# EAGLE board AniBike_v2.72_HS_MainBoard (EAGLE 5.08), part 1 of 2
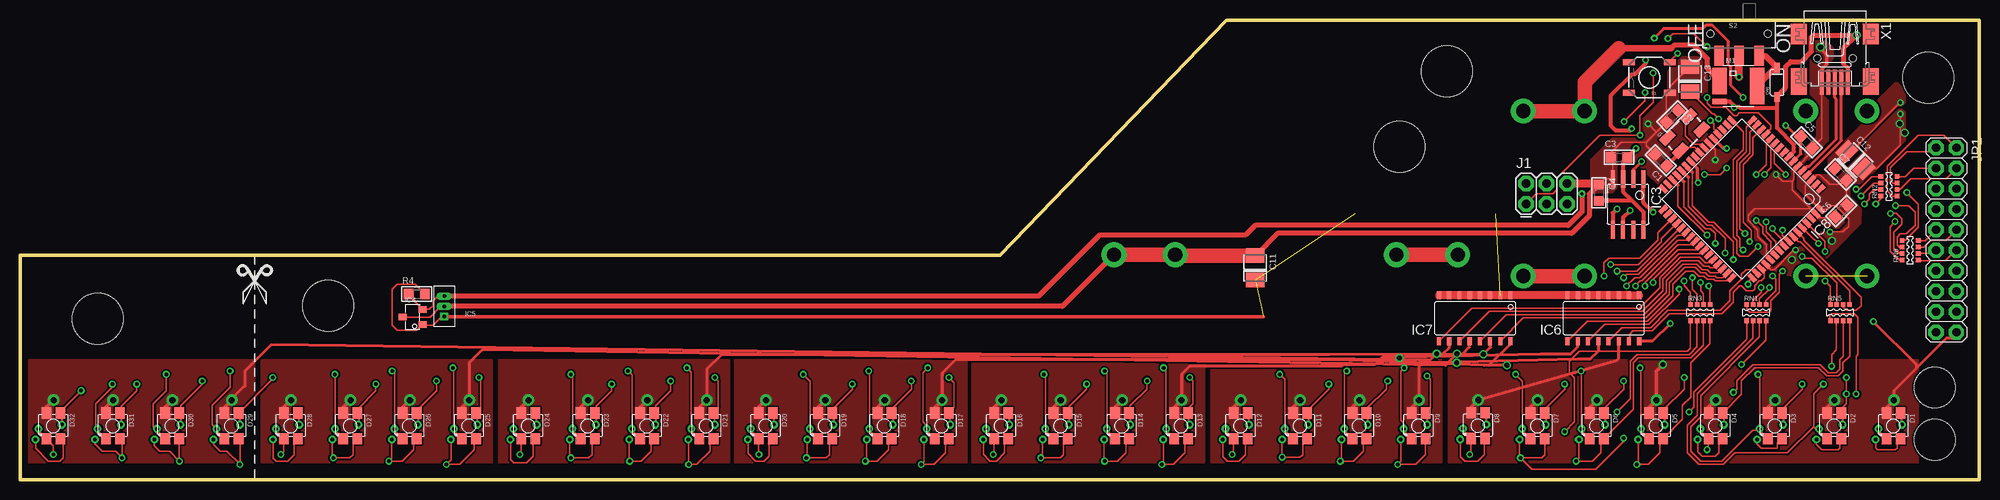
[diagram p0: board, top side]
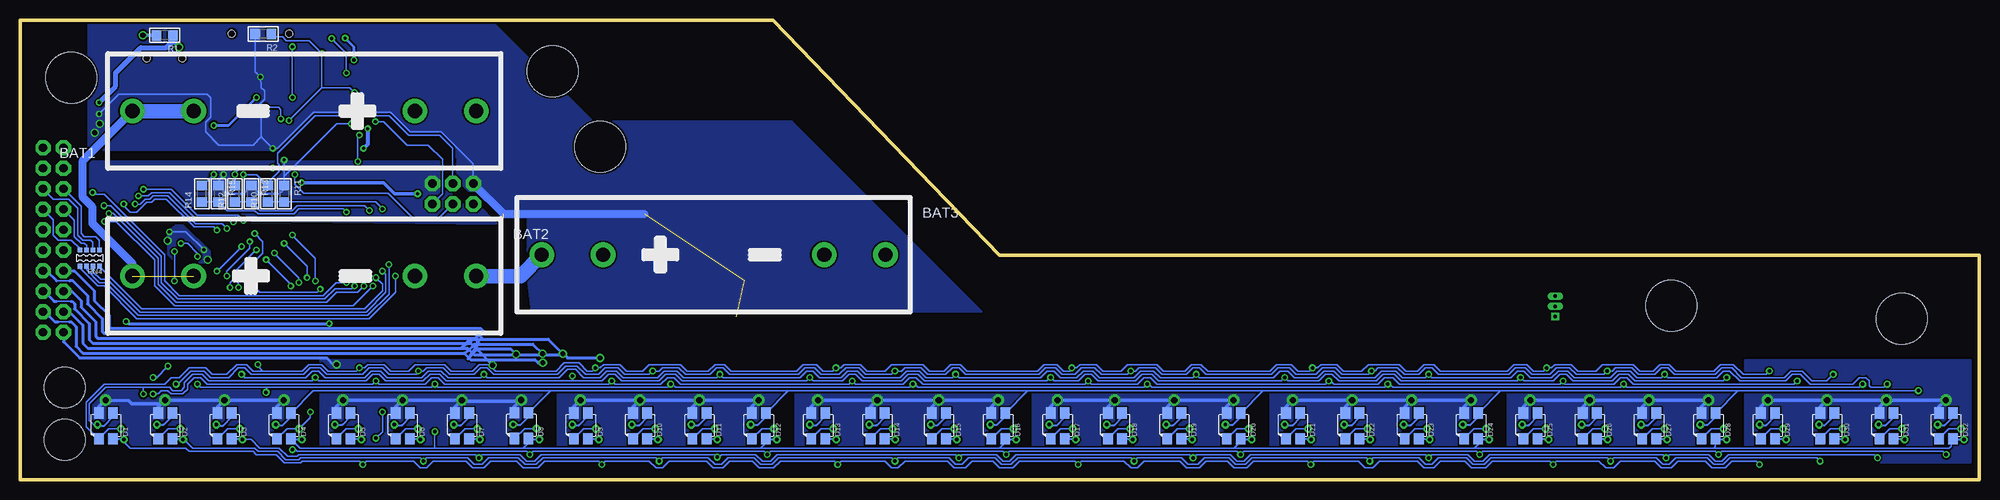
[diagram p1: board, bottom side, seen from below]

Size 243.13 x 57 mm. Coordinates in mm from the lower left corner, seen from the top.
Outline: 243.13,0 0,0 0,27.84 121.56,27.84 149.71,57 243.13,57 243.13,0
Copper layers (1*16): Top 0.035mm / dielectric 1.5mm / Bottom 0.035mm
Design rules "default *": minimum track width 7mil, minimum drill 15mil, track to track 8mil, track to pad 8mil, pad to pad 8mil, via to via 8mil, smd to smd 8mil, copper to edge 10mil, drill to drill 15mil, minimum pad ring 10mil, minimum via ring 8mil, stop-mask expansion 4mil, vias tented up to drill 0mil, thermal gap 10mil
Holes 6.35 mm at 236.78,49.83 9.6,19.96 38.25,21.59 171.15,41.3 177.04,50.65
Holes 5.08 mm at 237.59,4.93 237.59,11.43

## Footprints (pad centres in the part's own frame; a part is rotated, then mirrored left to right if it is on the bottom)
BATTERY_AAA = drill 1.778 pad 3.048 round: MINUS1 21.336,0; MINUS2 13.716,0; PLUS1 -21.336,0; PLUS2 -13.716,0
C0805 = smd 1.2 x 1.3: 1 -1.016,0; 2 1.016,0
C3528-21/T = smd 1.778 x 2.286: + 1.524,0; - -1.524,0
LED1210_DS = drill 0.432 pad 0.889 round: 1 -1.913,-0.353; 2 -2.25,-1.68; 3 1,0.15 | smd 1.2 x 1.4 bottom: 1_BOTTOM 0.85,-1.6; 2_BOTTOM -0.9,-1.6; 3_BOTTOM -0.9,1.6; 4_BOTTOM 0.85,1.6 | smd 1.2 x 1.4: 1_TOP -0.9,-1.6; 2_TOP 0.85,-1.6; 3_TOP 0.85,1.6; 4_TOP -0.9,1.6 | drill 0.762 pad 1.422 round: 4 0,3.2
SOD-123 = smd 1.2 x 0.7: ANODE -1.82,0; CATHODE 1.82,0
SOIC8 = smd 0.5 x 2.2: 1 -1.905,-3.154; 2 -0.645,-3.154; 3 0.625,-3.154; 4 1.895,-3.154; 5 1.905,3.154; 6 0.635,3.154; 7 -0.635,3.154; 8 -1.905,3.154
HALL_SENSOR_SE = smd 1 x 0.8: 1 1.15,-1; 2 1.15,0.9; 3 -1.35,-0.05
HALL_SENSOR_UA = drill 0.45 square: 1 0,-1.27 | drill 0.45 long: 2 0,0; 3 0,1.27
SOIC16 = smd 0.5 x 1: 1 -4.41,-2.84; 2 -3.14,-2.84; 3 -1.87,-2.84; 4 -0.6,-2.84; 5 0.67,-2.84; 6 1.94,-2.84; 7 3.21,-2.84; 8 4.48,-2.84; 9 4.48,2.84; 10 3.21,2.84; 11 1.94,2.84; 12 0.67,2.84; 13 -0.6,2.84; 14 -1.87,2.84; 15 -3.14,2.84; 16 -4.41,2.84
TQFP64 = smd 1.194 x 0.559: 1 -7.8,6; 2 -7.8,5.2; 3 -7.8,4.4; 4 -7.8,3.6; 5 -7.8,2.8; 6 -7.8,2; 7 -7.8,1.2; 8 -7.8,0.4; 9 -7.8,-0.4; 10 -7.8,-1.2; 11 -7.8,-2; 12 -7.8,-2.8; 13 -7.8,-3.6; 14 -7.8,-4.4; 15 -7.8,-5.2; 16 -7.8,-6; 33 7.8,-6; 34 7.8,-5.2; 35 7.8,-4.4; 36 7.8,-3.6; 37 7.8,-2.8; 38 7.8,-2; 39 7.8,-1.2; 40 7.8,-0.4; 41 7.8,0.4; 42 7.8,1.2; 43 7.8,2; 44 7.8,2.8; 45 7.8,3.6; 46 7.8,4.4; 47 7.8,5.2; 48 7.8,6 | smd 0.559 x 1.194: 17 -6,-7.8; 18 -5.2,-7.8; 19 -4.4,-7.8; 20 -3.6,-7.8; 21 -2.8,-7.8; 22 -2,-7.8; 23 -1.2,-7.8; 24 -0.4,-7.8; 25 0.4,-7.8; 26 1.2,-7.8; 27 2,-7.8; 28 2.8,-7.8; 29 3.6,-7.8; 30 4.4,-7.8; 31 5.2,-7.8; 32 6,-7.8; 49 6,7.8; 50 5.2,7.8; 51 4.4,7.8; 52 3.6,7.8; 53 2.8,7.8; 54 2,7.8; 55 1.2,7.8; 56 0.4,7.8; 57 -0.4,7.8; 58 -1.2,7.8; 59 -2,7.8; 60 -2.8,7.8; 61 -3.6,7.8; 62 -4.4,7.8; 63 -5.2,7.8; 64 -6,7.8
2X3 = drill 1.016 pad 1.88 octagon: 1 0,0; 2 0,2.54; 3 2.54,0; 4 2.54,2.54; 5 5.08,0; 6 5.08,2.54
2X10 = drill 1.016 pad 1.88 octagon: 1 -11.43,-1.27; 2 -11.43,1.27; 3 -8.89,-1.27; 4 -8.89,1.27; 5 -6.35,-1.27; 6 -6.35,1.27; 7 -3.81,-1.27; 8 -3.81,1.27; 9 -1.27,-1.27; 10 -1.27,1.27; 11 1.27,-1.27; 12 1.27,1.27; 13 3.81,-1.27; 14 3.81,1.27; 15 6.35,-1.27; 16 6.35,1.27; 17 8.89,-1.27; 18 8.89,1.27; 19 11.43,-1.27; 20 11.43,1.27
PMOS_SO-8 = smd 3.3 x 1.78: 1 -0.635,-2.326 | smd 0.72 x 1.78: 2 1.905,-2.326 | smd 4.53 x 1.78: 3 0,2.326
CRYSTAL-SMD-5X3 = smd 1.9 x 1.1: 1 -1.85,-1.15; 2 1.85,-1.15; 3 1.85,1.15; 4 -1.85,1.15
R0805 = smd 1.2 x 1.3: 1 -1.016,0; 2 1.016,0
YCTC164 = smd 0.559 x 0.6: P$1 -1.2,-1.003; P$2 -0.4,-1.003; P$3 0.4,-1.003; P$4 1.2,-1.003; P$5 1.2,1.003; P$6 0.4,1.003; P$7 -0.4,1.003; P$8 -1.2,1.003
TACTILE_SWITCH_SMD = smd 1.524 x 0.762: 1 -2.54,1.905; 2 2.54,1.905; 3 -2.54,-1.905; 4 2.54,-1.905
SWITCH-SPDT-SMD = smd 1.2 x 2.5: 1 -2.5,-2.75; 2 0,-2.75; 3 2.5,-2.75 | hole 0.9: -3.55,0; 3.55,0
32005-201 = smd 3.1 x 0.5: 1 3,1.6; 2 3,0.8; 3 3,0; 4 3,-0.8; 5 3,-1.6 | smd 2.5 x 2: M1 -3,-4.45; M2 -3,4.45 | smd 3.3 x 2: M3 2.9,4.45; M4 2.9,-4.45 | hole 0.9: 0,2.2; 0,-2.2

## Placement (x,y rotation side)
BAT1  BATTERY_AAA  [BATTERY_AAA]  207.87,45.72 180 bottom
BAT2  BATTERY_AAA  [BATTERY_AAA]  207.87,25.25 0 bottom
BAT3  BATTERY_AAA  [BATTERY_AAA]  157.07,27.89 0 bottom
C1  22pF  [C0805]  203.61,39.62 135 top
C2  22pF  [C0805]  205.03,45.06 225 top
C3  100nF  [C0805]  198.42,39.98 0 top
C4  100nF  [C0805]  195.91,35.59 270 top
C5  1uF  [C0805]  221.69,41.86 315 top
C6  100nF  [C0805]  226.01,33.32 45 top
C7  100nF  [C0805]  225.91,37.85 315 top
C11  47uF  [C3528-21/T]  153.26,26.26 270 top
C12  10uF  [C3528-21/T]  227.74,39.62 315 top
C13  10uF  [C3528-21/T]  207.21,49.68 270 top
D1  LED_RGB_DS  [LED1210_DS]  232.51,6.65 0 top
D2  LED_RGB_DS  [LED1210_DS]  225.15,6.65 0 top
D3  LED_RGB_DS  [LED1210_DS]  217.78,6.65 0 top
D4  LED_RGB_DS  [LED1210_DS]  210.41,6.65 0 top
D5  LED_RGB_DS  [LED1210_DS]  203.05,6.65 0 top
D6  LED_RGB_DS  [LED1210_DS]  195.68,6.65 0 top
D7  LED_RGB_DS  [LED1210_DS]  188.32,6.65 0 top
D8  LED_RGB_DS  [LED1210_DS]  180.95,6.68 0 top
D9  LED_RGB_DS  [LED1210_DS]  173.58,6.65 0 top
D10  LED_RGB_DS  [LED1210_DS]  166.22,6.65 0 top
D11  LED_RGB_DS  [LED1210_DS]  158.85,6.65 0 top
D12  LED_RGB_DS  [LED1210_DS]  151.49,6.65 0 top
D13  LED_RGB_DS  [LED1210_DS]  144.12,6.65 0 top
D14  LED_RGB_DS  [LED1210_DS]  136.75,6.65 0 top
D15  LED_RGB_DS  [LED1210_DS]  129.13,6.65 0 top
D16  LED_RGB_DS  [LED1210_DS]  121.77,6.65 0 top
D17  LED_RGB_DS  [LED1210_DS]  114.4,6.65 0 top
D18  LED_RGB_DS  [LED1210_DS]  107.29,6.65 0 top
D19  LED_RGB_DS  [LED1210_DS]  99.92,6.65 0 top
D20  LED_RGB_DS  [LED1210_DS]  92.56,6.65 0 top
D21  LED_RGB_DS  [LED1210_DS]  85.19,6.65 0 top
D22  LED_RGB_DS  [LED1210_DS]  77.83,6.65 0 top
D23  LED_RGB_DS  [LED1210_DS]  70.46,6.65 0 top
D24  LED_RGB_DS  [LED1210_DS]  63.09,6.65 0 top
D25  LED_RGB_DS  [LED1210_DS]  55.73,6.65 0 top
D26  LED_RGB_DS  [LED1210_DS]  48.36,6.65 0 top
D27  LED_RGB_DS  [LED1210_DS]  41,6.65 0 top
D28  LED_RGB_DS  [LED1210_DS]  33.63,6.65 0 top
D29  LED_RGB_DS  [LED1210_DS]  26.26,6.65 0 top
D30  LED_RGB_DS  [LED1210_DS]  18.9,6.65 0 top
D31  LED_RGB_DS  [LED1210_DS]  11.53,6.65 0 top
D32  LED_RGB_DS  [LED1210_DS]  4.17,6.65 0 top
D40  SM5819A  [SOD-123]  218.03,49.28 90 top
IC3  AT26DF321  [SOIC8]  199.54,34.14 180 top
IC4  HALL_SENSORSMT  [HALL_SENSOR_SE]  48.82,20.22 0 top
IC5  HALL_SENSORTH  [HALL_SENSOR_UA]  52.63,21.49 0 top
IC6  MMPQ2222  [SOIC16]  196.49,20.02 180 top
IC7  MMPQ2222  [SOIC16]  180.54,20.02 180 top
IC8  AT90USB647-AU  [TQFP64]  213.66,34.8 225 top
J1  AVR_SPI_PRG_6PTH  [2X3]  186.89,34.19 0 top
JP1  [2X10]  239.01,29.72 270 top
M1  IRF7404  [PMOS_SO-8]  213.21,48.82 270 top
Q1  [CRYSTAL-SMD-5X3]  206.55,42.93 45 top
R1  33k  [R0805]  225.2,55.12 180 bottom
R2  10K  [R0805]  212.95,55.27 180 bottom
R4  10K  [R0805]  49.23,23.01 0 top
R10  301  [R0805]  212.39,35.46 90 bottom
R11  650  [R0805]  210.36,35.46 270 bottom
R12  301  [R0805]  216.46,35.46 90 bottom
R13  650  [R0805]  214.43,35.46 270 bottom
R14  15k  [R0805]  220.57,35.46 90 bottom
R15  33k  [R0805]  218.52,35.46 270 bottom
RN1  RESISTOR_ARR4  [YCTC164]  215.44,20.73 0 top
RN2  RESISTOR_ARR4  [YCTC164]  231.9,36.37 90 top
RN3  RESISTOR_ARR4  [YCTC164]  208.48,20.73 0 top
RN4  RESISTOR_ARR4  [YCTC164]  234.49,27.48 180 bottom
RN5  RESISTOR_ARR4  [YCTC164]  225.83,20.73 0 top
RN6  RESISTOR_ARR4  [YCTC164]  234.54,28.45 90 top
S1  SWITCH-MOMENTARY-2SMD  [TACTILE_SWITCH_SMD]  202.18,49.89 180 top
S2  [SWITCH-SPDT-SMD]  213.31,55.32 0 top
X1  MINI-USB-32005-201  [32005-201]  225.2,52.27 270 top

## Library data of the parts
BAT1-BAT3 C1-C7 C11-C13 IC3 R1 R2 R4 X1 = AniBike_v3.0_Library
D1-D32 D40 IC4-IC7 M1 R10-R15 RN1-RN6 = AniBike_Common_Library
IC8 = at90usb
J1 JP1 Q1 S1 S2 = SparkFun

## Nets
+3V3: C3.2 C4.2 C5.1 IC3.3 IC3.8 IC8.7
+5V: C6.2 C7.2 C11.+ C12.+ IC4.1 IC5.1 IC6.1 IC6.2 IC6.3 IC6.4 IC6.5 IC6.6 IC6.7 IC6.8 IC7.1 IC7.2 IC7.3 IC7.4 IC7.5 IC7.6 IC7.7 IC7.8 IC8.3 IC8.21 IC8.52 IC8.64 J1.2 R2.2 R4.2 S2.2
CS: IC8.10 R14.2
CS_FLASH: IC3.1 R14.1 R15.2
D+: IC8.5 X1.3
D-: IC8.4 X1.2
GND: BAT3.MINUS1 BAT3.MINUS2 C1.2 C2.2 C3.1 C4.1 C5.2 C6.1 C7.1 C11.- C12.- C13.- IC3.4 IC4.3 IC5.2 IC8.6 IC8.22 IC8.53 IC8.63 J1.6 R1.1 R11.1 R13.1 R15.1 S1.1 X1.5
INT_SENSOR: IC4.2 IC5.3 IC8.26 R4.1
L1_B1: IC8.61 RN5.P$8
L1_B1_LED: D1.3 D1.3_BOTTOM D1.3_TOP D5.3 D5.3_BOTTOM D5.3_TOP D9.3 D9.3_BOTTOM D9.3_TOP D13.3 D13.3_BOTTOM D13.3_TOP D17.3 D17.3_BOTTOM D17.3_TOP D21.3 D21.3_BOTTOM D21.3_TOP D25.3 D25.3_BOTTOM D25.3_TOP D29.3 D29.3_BOTTOM D29.3_TOP RN5.P$1
L1_B2: IC8.60 RN5.P$7
L1_B2_LED: D2.3 D2.3_BOTTOM D2.3_TOP D6.3 D6.3_BOTTOM D6.3_TOP D10.3 D10.3_BOTTOM D10.3_TOP D14.3 D14.3_BOTTOM D14.3_TOP D18.3 D18.3_BOTTOM D18.3_TOP D22.3 D22.3_BOTTOM D22.3_TOP D26.3 D26.3_BOTTOM D26.3_TOP D30.3 D30.3_BOTTOM D30.3_TOP RN5.P$2
L1_B3: IC8.59 RN5.P$6
L1_B3_LED: D3.3 D3.3_BOTTOM D3.3_TOP D7.3 D7.3_BOTTOM D7.3_TOP D11.3 D11.3_BOTTOM D11.3_TOP D15.3 D15.3_BOTTOM D15.3_TOP D19.3 D19.3_BOTTOM D19.3_TOP D23.3 D23.3_BOTTOM D23.3_TOP D27.3 D27.3_BOTTOM D27.3_TOP D31.3 D31.3_BOTTOM D31.3_TOP RN5.P$3
L1_B4: IC8.58 RN5.P$5
L1_B4_LED: D4.3 D4.3_BOTTOM D4.3_TOP D8.3 D8.3_BOTTOM D8.3_TOP D12.3 D12.3_BOTTOM D12.3_TOP D16.3 D16.3_BOTTOM D16.3_TOP D20.3 D20.3_BOTTOM D20.3_TOP D24.3 D24.3_BOTTOM D24.3_TOP D28.3 D28.3_BOTTOM D28.3_TOP D32.3 D32.3_BOTTOM D32.3_TOP RN5.P$4
L1_G1: IC8.27 RN3.P$5
L1_G1_LED: D1.2 D1.2_BOTTOM D1.2_TOP D5.2 D5.2_BOTTOM D5.2_TOP D9.2 D9.2_BOTTOM D9.2_TOP D13.2 D13.2_BOTTOM D13.2_TOP D17.2 D17.2_BOTTOM D17.2_TOP D21.2 D21.2_BOTTOM D21.2_TOP D25.2 D25.2_BOTTOM D25.2_TOP D29.2 D29.2_BOTTOM D29.2_TOP RN3.P$4
L1_G2: IC8.28 RN3.P$6
L1_G2_LED: D2.2 D2.2_BOTTOM D2.2_TOP D6.2 D6.2_BOTTOM D6.2_TOP D10.2 D10.2_BOTTOM D10.2_TOP D14.2 D14.2_BOTTOM D14.2_TOP D18.2 D18.2_BOTTOM D18.2_TOP D22.2 D22.2_BOTTOM D22.2_TOP D26.2 D26.2_BOTTOM D26.2_TOP D30.2 D30.2_BOTTOM D30.2_TOP RN3.P$3
L1_G3: IC8.29 RN3.P$7
L1_G3_LED: D3.2 D3.2_BOTTOM D3.2_TOP D7.2 D7.2_BOTTOM D7.2_TOP D11.2 D11.2_BOTTOM D11.2_TOP D15.2 D15.2_BOTTOM D15.2_TOP D19.2 D19.2_BOTTOM D19.2_TOP D23.2 D23.2_BOTTOM D23.2_TOP D27.2 D27.2_BOTTOM D27.2_TOP D31.2 D31.2_BOTTOM D31.2_TOP RN3.P$2
L1_G4: IC8.30 RN3.P$8
L1_G4_LED: D4.2 D4.2_BOTTOM D4.2_TOP D8.2 D8.2_BOTTOM D8.2_TOP D12.2 D12.2_BOTTOM D12.2_TOP D16.2 D16.2_BOTTOM D16.2_TOP D20.2 D20.2_BOTTOM D20.2_TOP D24.2 D24.2_BOTTOM D24.2_TOP D28.2 D28.2_BOTTOM D28.2_TOP D32.2 D32.2_BOTTOM D32.2_TOP RN3.P$1
L1_R1: IC8.14 RN1.P$5
L1_R1_LED: D1.1 D1.1_BOTTOM D1.1_TOP D5.1 D5.1_BOTTOM D5.1_TOP D9.1 D9.1_BOTTOM D9.1_TOP D13.1 D13.1_BOTTOM D13.1_TOP D17.1 D17.1_BOTTOM D17.1_TOP D21.1 D21.1_BOTTOM D21.1_TOP D25.1 D25.1_BOTTOM D25.1_TOP D29.1 D29.1_BOTTOM D29.1_TOP RN1.P$4
L1_R2: IC8.15 RN1.P$7
L1_R2_LED: D2.1 D2.1_BOTTOM D2.1_TOP D6.1 D6.1_BOTTOM D6.1_TOP D10.1 D10.1_BOTTOM D10.1_TOP D14.1 D14.1_BOTTOM D14.1_TOP D18.1 D18.1_BOTTOM D18.1_TOP D22.1 D22.1_BOTTOM D22.1_TOP D26.1 D26.1_BOTTOM D26.1_TOP D30.1 D30.1_BOTTOM D30.1_TOP RN1.P$2
L1_R3: IC8.16 RN1.P$6
L1_R3_LED: D3.1 D3.1_BOTTOM D3.1_TOP D7.1 D7.1_BOTTOM D7.1_TOP D11.1 D11.1_BOTTOM D11.1_TOP D15.1 D15.1_BOTTOM D15.1_TOP D19.1 D19.1_BOTTOM D19.1_TOP D23.1 D23.1_BOTTOM D23.1_TOP D27.1 D27.1_BOTTOM D27.1_TOP D31.1 D31.1_BOTTOM D31.1_TOP RN1.P$3
L1_R4: IC8.17 RN1.P$8
L1_R4_LED: D4.1 D4.1_BOTTOM D4.1_TOP D8.1 D8.1_BOTTOM D8.1_TOP D12.1 D12.1_BOTTOM D12.1_TOP D16.1 D16.1_BOTTOM D16.1_TOP D20.1 D20.1_BOTTOM D20.1_TOP D24.1 D24.1_BOTTOM D24.1_TOP D28.1 D28.1_BOTTOM D28.1_TOP D32.1 D32.1_BOTTOM D32.1_TOP RN1.P$1
L2_B1: IC8.39 RN6.P$8
L2_B1_LED: JP1.12 RN6.P$1
L2_B2: IC8.40 RN6.P$7
L2_B2_LED: JP1.11 RN6.P$2
L2_B3: IC8.41 RN6.P$6
L2_B3_LED: JP1.10 RN6.P$3
L2_B4: IC8.42 RN6.P$5
L2_B4_LED: JP1.9 RN6.P$4
L2_G1: IC8.35 RN4.P$5
L2_G1_LED: JP1.8 RN4.P$4
L2_G2: IC8.36 RN4.P$6
L2_G2_LED: JP1.7 RN4.P$3
L2_G3: IC8.37 RN4.P$7
L2_G3_LED: JP1.6 RN4.P$2
L2_G4: IC8.38 RN4.P$8
L2_G4_LED: JP1.5 RN4.P$1
L2_R1: IC8.57 RN2.P$8
L2_R1_LED: JP1.2 RN2.P$1
L2_R2: IC8.56 RN2.P$7
L2_R2_LED: JP1.4 RN2.P$2
L2_R3: IC8.55 RN2.P$6
L2_R3_LED: JP1.1 RN2.P$3
L2_R4: IC8.54 RN2.P$5
L2_R4_LED: JP1.3 RN2.P$4
MISO: IC3.2 IC8.13 J1.1
MOSI: IC8.12 J1.4 R10.2
MOSI_FLASH: IC3.5 R10.1 R11.2
N$1: C2.1 IC8.23 Q1.3
N$2: C1.1 IC8.24 Q1.1
N$3: D40.CATHODE M1.3 S2.3
N$4: BAT2.MINUS1 BAT2.MINUS2 BAT3.PLUS1 BAT3.PLUS2
N$5: BAT1.MINUS1 BAT1.MINUS2 BAT2.PLUS1 BAT2.PLUS2
RESET: IC8.20 J1.5 R2.1 S1.3
ROW1: IC6.15 IC8.51
ROW1_LED: D1.4 D1.4_BOTTOM D1.4_TOP D2.4 D2.4_BOTTOM D2.4_TOP D3.4 D3.4_BOTTOM D3.4_TOP D4.4 D4.4_BOTTOM D4.4_TOP IC6.16 JP1.20
ROW2: IC6.13 IC8.50
ROW2_LED: D5.4 D5.4_BOTTOM D5.4_TOP D6.4 D6.4_BOTTOM D6.4_TOP D7.4 D7.4_BOTTOM D7.4_TOP D8.4 D8.4_BOTTOM D8.4_TOP IC6.14 JP1.19
ROW3: IC6.11 IC8.49
ROW3_LED: D9.4 D9.4_BOTTOM D9.4_TOP D10.4 D10.4_BOTTOM D10.4_TOP D11.4 D11.4_BOTTOM D11.4_TOP D12.4 D12.4_BOTTOM D12.4_TOP IC6.12 JP1.18
ROW4: IC6.9 IC8.48
ROW4_LED: D13.4 D13.4_BOTTOM D13.4_TOP D14.4 D14.4_BOTTOM D14.4_TOP D15.4 D15.4_BOTTOM D15.4_TOP D16.4 D16.4_BOTTOM D16.4_TOP IC6.10 JP1.17
ROW5: IC7.15 IC8.47
ROW5_LED: D17.4 D17.4_BOTTOM D17.4_TOP D18.4 D18.4_BOTTOM D18.4_TOP D19.4 D19.4_BOTTOM D19.4_TOP D20.4 D20.4_BOTTOM D20.4_TOP IC7.16 JP1.16
ROW6: IC7.13 IC8.46
ROW6_LED: D21.4 D21.4_BOTTOM D21.4_TOP D22.4 D22.4_BOTTOM D22.4_TOP D23.4 D23.4_BOTTOM D23.4_TOP D24.4 D24.4_BOTTOM D24.4_TOP IC7.14 JP1.15
ROW7: IC7.11 IC8.45
ROW7_LED: D25.4 D25.4_BOTTOM D25.4_TOP D26.4 D26.4_BOTTOM D26.4_TOP D27.4 D27.4_BOTTOM D27.4_TOP D28.4 D28.4_BOTTOM D28.4_TOP IC7.12 JP1.14
ROW8: IC7.9 IC8.44
ROW8_LED: D29.4 D29.4_BOTTOM D29.4_TOP D30.4 D30.4_BOTTOM D30.4_TOP D31.4 D31.4_BOTTOM D31.4_TOP D32.4 D32.4_BOTTOM D32.4_TOP IC7.10 JP1.13
SCK: IC8.11 J1.3 R12.2
SCK_FLASH: IC3.6 R12.1 R13.2
UID: IC8.9
UVCON: IC8.2
VBUS: C13.+ D40.ANODE IC8.8 M1.2 R1.2 X1.1
VCC_BAT: BAT1.PLUS1 BAT1.PLUS2 M1.1